# Altium PCB HumFlex1.PcbDoc
Units mm, origin at the board's own origin, x right, y up, seen from the top; angles counter-clockwise.
Board outline 100 x 48 mm, 2 copper layers (Top Layer, Bottom Layer), stack 0.187 mm thick; 16 components, 9 nets, 76 pads, 903 vias.
Unrouted connection lines stored in the file: 38.
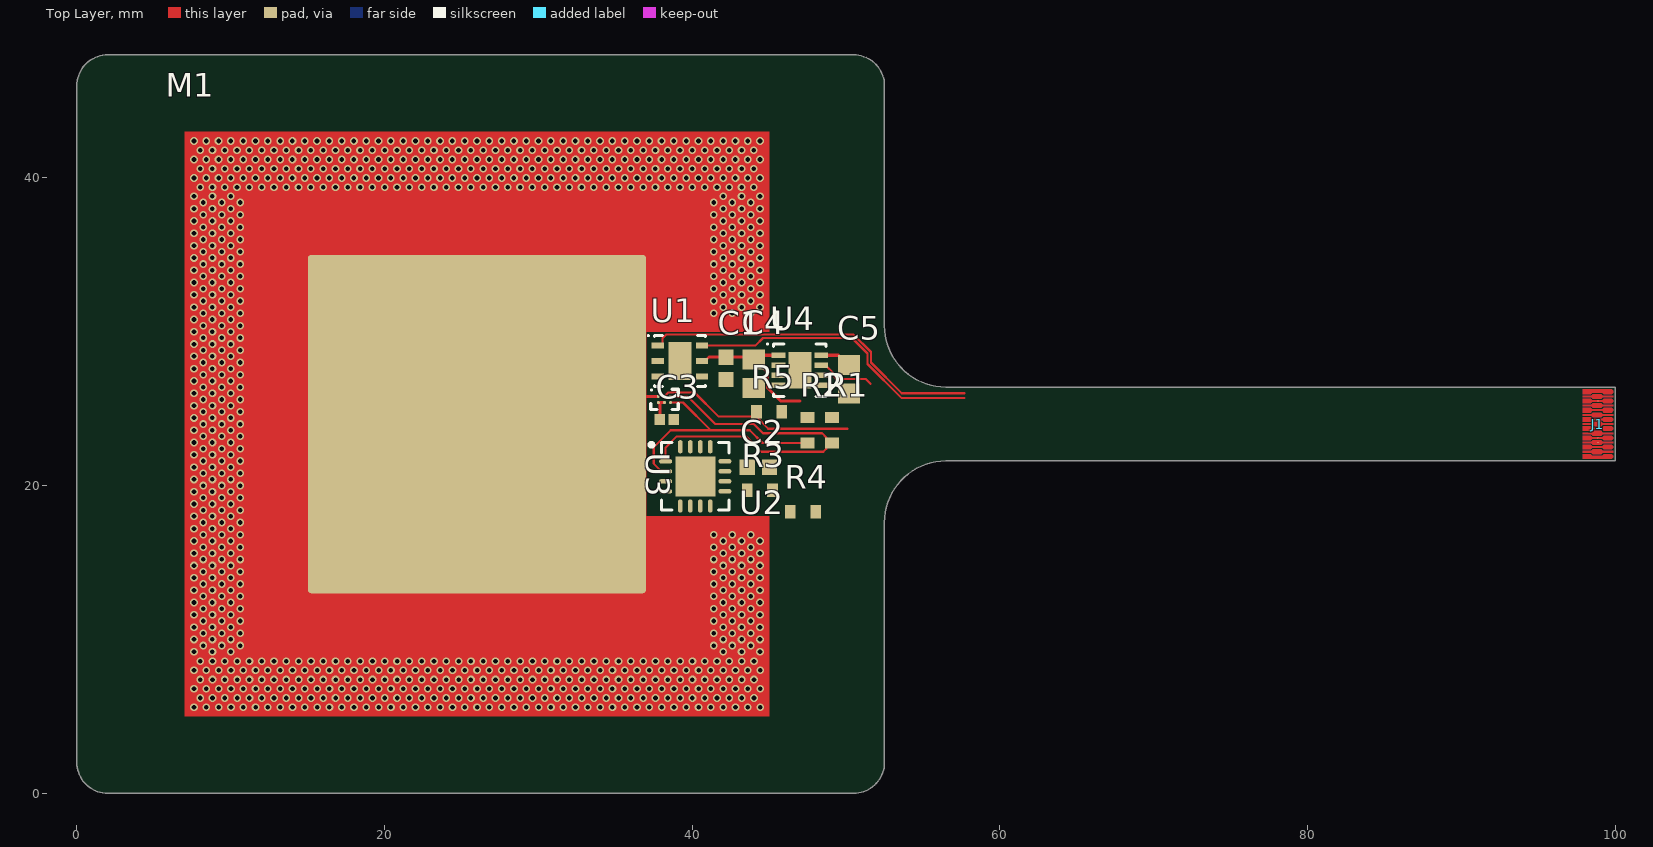
[diagram p0: Top Layer view]
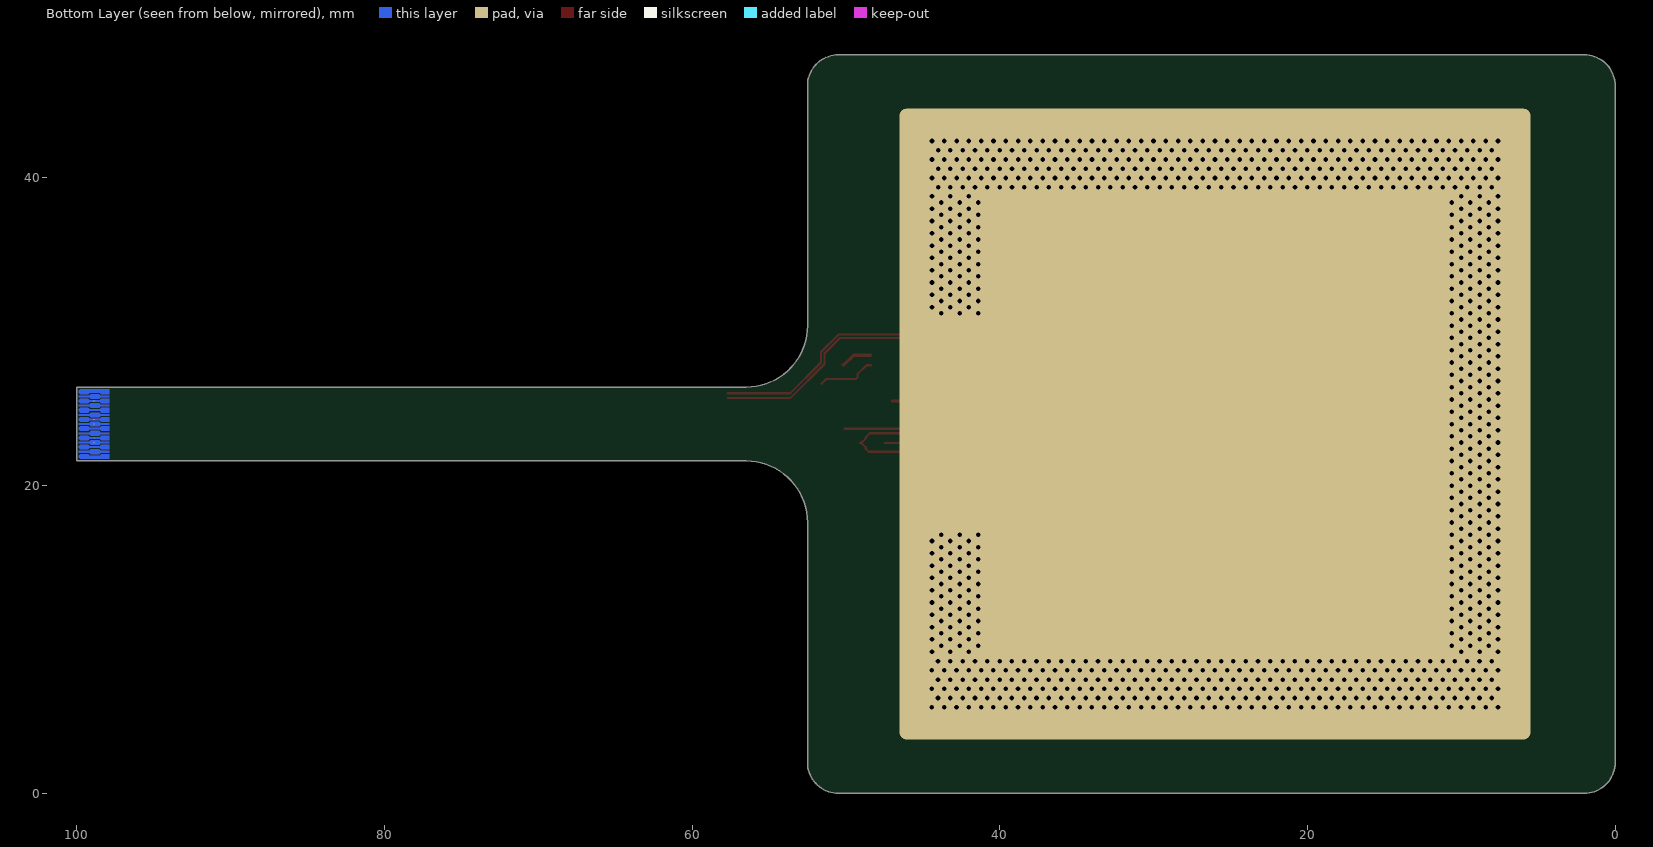
[diagram p1: Bottom Layer view, seen from below]

## Layer stack, top to bottom
Stiffener 1: core 0.1016, Core-009, Dk 4.5
Board Layer Stack Top Coverlay: solder mask 0.012, FC-001, Dk 4
Top Layer: signal copper 0.0175
Dielectric 1: core 0.0508, Core-001, Dk 4.1
Bottom Layer: signal copper 0.0175
Board Layer Stack Bottom Coverlay: solder mask 0.012, FC-001, Dk 4

## Board outline
2,0 cw(c2,2) 0,2 0,46 cw(c2,46) 2,48 50.5,48 cw(c50.5,46) 52.5,46 52.5,30.4 ccw(c56.5,30.4) 56.5,26.4 100,26.4 100,21.6 56.5,21.6 ccw(c56.5,17.6) 52.5,17.6 52.5,2 cw(c50.5,2) 50.5,0

## Design rules (kind name [scope] priority, off if disabled: settings)
Clearance [All] p1: gap=0.08 ignorepadtopadclearanceinfootprint=FALSE
HoleSize [All] p1: absolutevalues=TRUE maxlimit=2.54 minlimit=0.2 maxpercent=80.000 minpercent=20.000
HoleToHoleClearance [All] p1: gap=0.3 allowstackedmicrovias=TRUE
MinimumAnnularRing [All] p1: minimumring=0.1
MinimumSolderMaskSliver [HasFootprint('PeltierElement')] p1: minsoldermaskwidth=0
MinimumSolderMaskSliver MinimumSolderMaskSliver_1 [All] p2: minsoldermaskwidth=0
PolygonConnect [All] p1: connectstyle=Relief reliefconductorwidth=0.254 reliefentries=4 polygonreliefangle="90 Angle" airgapwidth=0.254
RoutingVias [All] p1: holewidth=0.711 width=1.27 viastyle="Through Hole" minholewidth=0.711 minwidth=1.27 maxholewidth=0.711 maxwidth=1.27
SilkToSilkClearance [All] p1: silktosilkclearance=0.15
SilkToSolderMaskClearance [IsPad] p1: minsilkscreentomaskgap=0.15 clearancetoexposedcopper=TRUE
SolderMaskExpansion [All] p1: expansion=0.1 istentingtop=FALSE
Width [All] p1: maxlimit=2 minlimit=0.08 preferedwidth=0.2
25 further rules are at their usual default settings.

## Components (designator, comment, footprint, x,y, rotation, side; value= is the part's Value field where it differs from the comment)
C1 "100nF" CAP_SM0603_YAGEOCC2_N 42.2,27.627 r90 top
C2 "100nF" CAP_SM0603_YAGEOCC2_N 44.3,21.2 r180 top
C3 "10nF" CAP_SM0402_YAGEOCC2_N 38.35,24.3 r0 top
C4 "1uF" CAP_SM0805_YAGEOCC2_N 44,27.273 r90 top
C5 "1uF" CAP_SM0805_YAGEOCC2_N 50.2,26.927 r90 top
J1 "Dual Row 15Pos Connector" AYF331535_FPC 99.886,26.1 r270 top
M1 "Peltier Element" PeltierElement 26.011,24 r0 top locked
R1 "10K" RES_SM0603_YAGEORC_N 49.1,23.6 r90 top
R2 "10K" RES_SM0603_YAGEORC_N 47.5,23.6 r90 top
R3 "10K" RES_SM0603_YAGEORC_N 44.4,19.7 r0 top
R4 "10K" RES_SM0603_YAGEORC_N 47.2,18.3 r0 top
R5 "10K" RES_SM0603_YAGEORC_N 45,24.8 r0 top
U1 "SI7051-A20-IMR" SI7050/1/2/3/4/5 39.2,28.1 r0 top
U2 "ADT7422CCPZ-RL7" ADT7422_QFN 40.2,20.6 r0 top
U3 "AS6221" AS6221_BGA 38.2,25.6 r0 top
U4 "TPS78433" TPS784xxxQDRBRQ1_SON 47,27.5 r0 top

## Footprints (in the part's own frame and the unit in brackets; to place one, negate y for a bottom-side part, rotate by r counter-clockwise, add the part's x,y. Pads: shape width x height; smd on the part's side, far side on the other; paste and mask are expansions set on the pad)
ADT7422_QFN [mm] "QFN, 16-Leads, Body 4,00x4,00mm, Pitch 0,65mm, Thermal Pad 2,60x2,60mm, IPC Medium Density"
  oval 0.85x0.3 smd: 1(-1.925,0.975) 2(-1.925,0.325) 3(-1.925,-0.325) 4(-1.925,-0.975) 9(1.925,-0.975) 10(1.925,-0.325) 11(1.925,0.325) 12(1.925,0.975)
  oval 0.3x0.85 smd: 5(-0.975,-1.925) 6(-0.325,-1.925) 7(0.325,-1.925) 8(0.975,-1.925) 13(0.975,1.925) 14(0.325,1.925) 15(-0.325,1.925) 16(-0.975,1.925)
  rect 2.6x2.6 smd: 17(0,0)
  silkscreen extent -2.97,-2.2 2.2,2.2, body extent -2.05,-2.05 2.05,2.05, height 0.8
AS6221_BGA [mm] "BGA, 6-Leads, Body 1,02x1,50mmx0,53mm, Pitch 0,40mm"
  round 0.2 smd: A1(-0.4,0.2) A2(0,0.2) A3(0.4,0.2) B1(-0.4,-0.2) B2(0,-0.2) B3(0.4,-0.2)
  silkscreen extent -0.9,-0.66 0.89,0.66, body extent -0.74,-0.51 0.74,0.51, height 0.55
AYF331535_FPC [mil]
  round 1 all layers, no hole paste-99999 mask+3.94: 1(0,-39.37) 2(11.81,-39.37)
  round 1 all layers, no hole paste-99999: 3(23.62,-39.37) 4(35.43,-39.37) 5(47.24,-39.37) 6(59.06,-39.37) 7(70.87,-39.37) 8(82.68,-39.37) 9(94.49,-39.37) 10(106.3,-39.37) 11(118.11,-39.37) 12(129.92,-39.37) 13(141.73,-39.37) 14(153.54,-39.37) 15(165.35,-39.37)
  Top Layer region: 159.45,-78.74 159.45,-58.07 163.39,-54.13 163.39,-54.13 163.39,-28.54 159.45,-24.61 159.45,-24.61 159.45,-3.94 163.39,0 167.32,0 171.26,-3.94 171.26,-78.74
  Top Layer region: 147.64,-52.17 147.64,-30.51 151.57,-26.57 151.57,0 155.51,0 155.51,-26.57 159.45,-30.51 159.45,-52.17 155.51,-56.1 155.51,-78.74 151.57,-78.74 151.57,-56.1
  Top Layer region: 135.83,-78.74 135.83,-58.07 139.76,-54.13 139.76,-28.54 135.83,-24.61 135.83,-3.94 139.76,0 143.7,0 147.64,-3.94 147.64,-24.61 143.7,-28.54 143.7,-54.13 147.64,-58.07 147.64,-78.74
  Top Layer region: 124.02,-52.17 124.02,-30.51 127.95,-26.57 127.95,0 131.89,0 131.89,-26.57 135.83,-30.51 135.83,-52.17 131.89,-56.1 131.89,-78.74 127.95,-78.74 127.95,-56.1
  Top Layer region: 112.2,-78.74 112.2,-58.07 116.14,-54.13 116.14,-28.54 112.2,-24.61 112.2,-3.94 116.14,0 120.08,0 124.02,-3.94 124.02,-24.61 120.08,-28.54 120.08,-54.13 124.02,-58.07 124.02,-78.74
  Top Layer region: 100.39,-52.17 100.39,-30.51 104.33,-26.57 104.33,0 108.27,0 108.27,-26.57 112.2,-30.51 112.2,-52.17 108.27,-56.1 108.27,-78.74 104.33,-78.74 104.33,-56.1
  Top Layer region: 88.58,-78.74 88.58,-58.07 92.52,-54.13 92.52,-28.54 88.58,-24.61 88.58,-3.94 92.52,0 96.46,0 100.39,-3.94 100.39,-24.61 96.46,-28.54 96.46,-54.13 100.39,-58.07 100.39,-78.74
  Top Layer region: 76.77,-52.17 76.77,-30.51 80.71,-26.57 80.71,0 84.65,0 84.65,-26.57 88.58,-30.51 88.58,-52.17 84.65,-56.1 84.65,-78.74 80.71,-78.74 80.71,-56.1
  Top Layer region: 53.15,-52.17 53.15,-30.51 57.09,-26.57 57.09,0 61.02,0 61.02,-26.57 64.96,-30.51 64.96,-52.17 61.02,-56.1 61.02,-78.74 57.09,-78.74 57.09,-56.1
  Top Layer region: 64.96,-78.74 64.96,-58.07 68.9,-54.13 68.9,-28.54 64.96,-24.61 64.96,-3.94 68.9,0 72.83,0 76.77,-3.94 76.77,-24.61 72.83,-28.54 72.83,-54.13 76.77,-58.07 76.77,-78.74
  Top Layer region: 41.34,-78.74 41.34,-58.07 45.28,-54.13 45.28,-28.54 41.34,-24.61 41.34,-3.94 45.28,0 49.21,0 53.15,-3.94 53.15,-24.61 49.21,-28.54 49.21,-54.13 53.15,-58.07 53.15,-78.74
  Top Layer region: 29.53,-52.17 29.53,-30.51 33.46,-26.57 33.46,0 37.4,0 37.4,-26.57 41.34,-30.51 41.34,-52.17 37.4,-56.1 37.4,-78.74 33.46,-78.74 33.46,-56.1
  Top Layer region: 17.72,-78.74 17.72,-58.07 21.65,-54.13 21.65,-28.54 17.72,-24.61 17.72,-3.94 21.65,0 25.59,0 29.53,-3.94 29.53,-24.61 25.59,-28.54 25.59,-54.13 29.53,-58.07 29.53,-78.74
  Top Layer region: 5.91,-52.17 5.91,-30.51 9.84,-26.57 9.84,0 13.78,0 13.78,-26.57 17.72,-30.51 17.72,-52.17 13.78,-56.1 13.78,-78.74 9.84,-78.74 9.84,-56.1
  Top Layer region: -5.91,-78.74 -5.91,-3.94 -1.97,0 -1.97,0 1.97,0 5.91,-3.94 5.91,-24.61 1.97,-28.54 1.97,-54.13 5.91,-58.07 5.91,-78.74
  Bottom Layer region: 159.45,-78.74 159.45,-58.07 163.39,-54.13 163.39,-54.13 163.39,-28.54 159.45,-24.61 159.45,-24.61 159.45,-3.94 163.39,0 167.32,0 171.26,-3.94 171.26,-78.74
  Bottom Layer region: 147.64,-52.17 147.64,-30.51 151.57,-26.57 151.57,0 155.51,0 155.51,-26.57 159.45,-30.51 159.45,-52.17 155.51,-56.1 155.51,-78.74 151.57,-78.74 151.57,-56.1
  Bottom Layer region: 135.83,-78.74 135.83,-58.07 139.76,-54.13 139.76,-28.54 135.83,-24.61 135.83,-3.94 139.76,0 143.7,0 147.64,-3.94 147.64,-24.61 143.7,-28.54 143.7,-54.13 147.64,-58.07 147.64,-78.74
  Bottom Layer region: 124.02,-52.17 124.02,-30.51 127.95,-26.57 127.95,0 131.89,0 131.89,-26.57 135.83,-30.51 135.83,-52.17 131.89,-56.1 131.89,-78.74 127.95,-78.74 127.95,-56.1
  Bottom Layer region: 112.2,-78.74 112.2,-58.07 116.14,-54.13 116.14,-28.54 112.2,-24.61 112.2,-3.94 116.14,0 120.08,0 124.02,-3.94 124.02,-24.61 120.08,-28.54 120.08,-54.13 124.02,-58.07 124.02,-78.74
  Bottom Layer region: 100.39,-52.17 100.39,-30.51 104.33,-26.57 104.33,0 108.27,0 108.27,-26.57 112.2,-30.51 112.2,-52.17 108.27,-56.1 108.27,-78.74 104.33,-78.74 104.33,-56.1
  Bottom Layer region: 88.58,-78.74 88.58,-58.07 92.52,-54.13 92.52,-28.54 88.58,-24.61 88.58,-3.94 92.52,0 96.46,0 100.39,-3.94 100.39,-24.61 96.46,-28.54 96.46,-54.13 100.39,-58.07 100.39,-78.74
  Bottom Layer region: 76.77,-52.17 76.77,-30.51 80.71,-26.57 80.71,0 84.65,0 84.65,-26.57 88.58,-30.51 88.58,-52.17 84.65,-56.1 84.65,-78.74 80.71,-78.74 80.71,-56.1
  Bottom Layer region: 53.15,-52.17 53.15,-30.51 57.09,-26.57 57.09,0 61.02,0 61.02,-26.57 64.96,-30.51 64.96,-52.17 61.02,-56.1 61.02,-78.74 57.09,-78.74 57.09,-56.1
  Bottom Layer region: 64.96,-78.74 64.96,-58.07 68.9,-54.13 68.9,-28.54 64.96,-24.61 64.96,-3.94 68.9,0 72.83,0 76.77,-3.94 76.77,-24.61 72.83,-28.54 72.83,-54.13 76.77,-58.07 76.77,-78.74
  Bottom Layer region: 41.34,-78.74 41.34,-58.07 45.28,-54.13 45.28,-28.54 41.34,-24.61 41.34,-3.94 45.28,0 49.21,0 53.15,-3.94 53.15,-24.61 49.21,-28.54 49.21,-54.13 53.15,-58.07 53.15,-78.74
  Bottom Layer region: 29.53,-52.17 29.53,-30.51 33.46,-26.57 33.46,0 37.4,0 37.4,-26.57 41.34,-30.51 41.34,-52.17 37.4,-56.1 37.4,-78.74 33.46,-78.74 33.46,-56.1
  Bottom Layer region: 17.72,-78.74 17.72,-58.07 21.65,-54.13 21.65,-28.54 17.72,-24.61 17.72,-3.94 21.65,0 25.59,0 29.53,-3.94 29.53,-24.61 25.59,-28.54 25.59,-54.13 29.53,-58.07 29.53,-78.74
  Bottom Layer region: 5.91,-52.17 5.91,-30.51 9.84,-26.57 9.84,0 13.78,0 13.78,-26.57 17.72,-30.51 17.72,-52.17 13.78,-56.1 13.78,-78.74 9.84,-78.74 9.84,-56.1
  Bottom Layer region: -5.91,-78.74 -5.91,-3.94 -1.97,0 -1.97,0 1.97,0 5.91,-3.94 5.91,-24.61 1.97,-28.54 1.97,-54.13 5.91,-58.07 5.91,-78.74
CAP_SM0402_YAGEOCC2_N [mm] "Capacitor, Yageo CC Class2, SM0402, IPC Medium Density"
  rect 0.68x0.72 smd: 1(-0.45,0) 2(0.45,0)
  body extent -0.55,-0.35 0.55,0.35, height 0.6
CAP_SM0603_YAGEOCC2_N [mm] "Capacitor, Yageo CC Class2, SM0603, IPC Medium Density"
  rect 1x1 smd: 1(-0.727,0) 2(0.727,0)
  body extent -0.9,-0.5 0.9,0.5, height 0.9
CAP_SM0805_YAGEOCC2_N [mm] "Capacitor, Yageo CC Class2, SM0805, IPC Medium Density"
  rect 1.3x1.45 smd: 1(-0.927,0) 2(0.927,0)
  body extent -1.1,-0.72 1.1,0.72, height 1.45
PeltierElement [mm]
  rrect2% 22x22 smd paste-2539.97: 1(0,0)
  rrect2% 41x41 smd far side paste-2539.97: 1(0,0)
  Top Layer region: -19,19 -19,-19 19,-19 19,-6 11,-6 11,6 19,6 19,19 -18.4,19 -18.8,19
  body extent -20,-20 20,20, height 4
RES_SM0603_YAGEORC_N [mm] "Resistor, Yageo RC_L, SM0603, IPC Medium Density"
  rect 0.7x0.9 smd: 1(-0.827,0) 2(0.827,0)
  body extent -0.85,-0.45 0.85,0.45, height 0.55
SI7050/1/2/3/4/5 [mm] "SON, 6-Leads, Body 3,00x3,00mm, Pitch 1,00mm, Thermal Pad 2,50x1,50mm, IPC Medium Density"
  rect 0.8x0.4 smd: 1(-1.44,1) 2(-1.44,0) 3(-1.44,-1) 4(1.44,-1) 5(1.44,0) 6(1.44,1)
  rect 1.5x2.5 smd: 7(0,0)
  silkscreen extent -2.1,-1.65 1.65,1.7, body extent -1.5,-1.5 1.5,1.5, height 0.8
TPS784xxxQDRBRQ1_SON [mm] "SON127P600-8N"
  rect 0.9x0.35 smd: 1(-1.395,0.975) 2(-1.395,0.325) 3(-1.395,-0.325) 4(-1.395,-0.975) 5(1.395,-0.975) 6(1.395,-0.325) 7(1.395,0.325) 8(1.395,0.975)
  rect 1.49x2.4 smd: 9(0,0)
  silkscreen extent -2.15,-1.7 1.7,1.75, body extent -1.55,-1.55 1.55,1.55, height 1

## Part data
C1 C2: library part CC0603KRX7R9BB104, "CAP 100nF SM0603 X7R 50V YAGEO CC2", Manufacturer=Yageo, Package=0603, Supplier Part Number 1=1362556, Tolerance (%)=10, Voltage Rating (Volts)=50, Category=Capacitor, ComponentLink1Description="Manufacturer Website", ComponentLink1URL=http://www.yageo.com, Manufacturer Part Number=CC0603KRX7R9BB104, Supplier 1=Farnell, Supplier 2=Digi-Key, Supplier Part Number 2=311-1344-1-ND
C3: library part CC0402KRX7R9BB103, "CAP 10nF SM0402 X7R 50V YAGEO CC2", Manufacturer=Yageo, Manufacturer Part Number=CC0603KRX7R9BB103, Package=0603, Supplier Part Number 1=3369167, Tolerance (%)=10, Voltage Rating (Volts)=50, Category=Capacitor, ComponentLink1Description="Manufacturer Website", ComponentLink1URL=http://www.yageo.com, Supplier 1=Farnell, Supplier 2=Mouser, Supplier 3=Digi-Key, Supplier Part Number 2=603-CC402KRX7R9BB103, Supplier Part Number 3=311-1349-1-ND
C4 C5: library part CC0805KKX7R8BB105, "CAP 1uF SM0805 X7R 25V YAGEO CC2", Manufacturer=Yageo, Package=0805, Supplier Part Number 1=1458903, Tolerance (%)=10, Voltage Rating (Volts)=25, Category=Capacitor, ComponentLink1Description="Manufacturer Website", ComponentLink1URL=http://www.yageo.com, Manufacturer Part Number=CC0805KKX7R8BB105, Supplier 1=Farnell, Supplier 2=Digi-Key, Supplier Part Number 2=311-1456-1-ND
J1: library part Connector_15_DualRow
M1: library part PeltierElement, "Peltier element 40mm x 40mm"
R1 R2 R3 R4 R5: library part RC0603FR-0710KL, "RES 10K SM0603 YAGEO RC_L", Manufacturer=Yageo, Package=0603, Power (Watts)=0.1, Resistance (Ohms)=10000, Supplier Part Number 1=9238603, Tolerance (%)=1, Category=Resistor, ComponentLink1Description="Manufacturer Website", ComponentLink1URL=http://www.yageo.com, Manufacturer Part Number=RC0603FR-0710KL, Supplier 1=Farnell, Supplier 2=Digi-Key, Supplier Part Number 2=311-10.0KHRCT-ND
U1: "Si7051-A20 Temperature Sensor ±0.1°C maximum accuracy, Digital I2C, -40°C ~ 125°C 14b 6-DFN (3x3)", Supplier Part Number 1=3265013RL, Supplier 1=Farnell, Supplier 2=Mouser, Supplier 3=Digi-Key, Supplier Part Number 2=634-SI7051-A20-IMR, Supplier Part Number 3=336-4764-1-ND
U2: "ADT7422 Temperature Sensor, ±0.1°C Accuracy, 16b, Digital I2C /  -40°C bis 125°C 16-LFCSP-WQ (4x4)", Supplier Part Number 1=584-ADT7422CCPZ-RL7, Supplier 1=Mouser, Supplier 2=Digi-Key, Supplier Part Number 2=505-ADT7422CCPZ-RL7CT-ND
U3: library part AS6221-AWLT-S, "AS6221 Temperature Sensor Digital -40°C ~ 125°C 16b 6-WLCSP (1.5x1.03)", Supplier Part Number 1=985-AS6221-AWLT-S, Supplier 1=Mouser, Supplier 2=Digi-Key, Supplier Part Number 2=4991-AS6221-AWLT-SCT-ND
U4: library part TPS78433QWDRBRQ1, "TPS78433-Q1 3.3V, 300-mA, High-PSRR Low-Dropout Voltage Regulator With High Accuracy and Enable,  8-SON (3x3)", Supplier Part Number 1=595-TPS78433QWDRBRQ1, Supplier 1=Mouser, Supplier 2=Digi-Key, Supplier Part Number 2=296-TPS78433QWDRBRQ1CT-ND

## Via types
v1: diameter 0.5, hole 0.3, Top Layer to Bottom Layer, tented top, 903 vias

## Nets (pads, with @x,y where several pads share a name; then routed paths per layer and width w, separated by ;. In a path a pad name is that pad's centre, name@x,y a point inside that pad or via, vN(x,y) a via of type N, cw(c..) or ccw(c..) an arc to the next point about the centre after c; other vN are vias at no path point)
3V: C1.2 C2.2 C3.1 C4.2 R1.2 R2.2 R3.2 R4.2 R5.2 U1.5 U2.12 U3.B1 U3.B2 U4.1 | length 11.5
  Top Layer w0.2: C3.1 37.9,25.3 U3.B1 37.9,25.4 U3.B2 ; U1.5 40.84,28.1 41.094,28.354 C1.2 43.846,28.354 C4.2 ; U4.1 44.275,28.475 C4.2 ; 47,25.5 45.75,25.5 44.908,26.343 44.908,27.367 44.075,28.2 C4.2
GND: C1.1 C2.1 C3.2 C4.1 C5.1 M1.1 U1.2 U2.3 U2.4 U2.5 U2.6 U2.7 U2.8 U2.11 U2.13 U2.14 U2.15 U2.16 U2.17 U3.A1 U4.5 | length 11.9
  Top Layer w0.2: M1.1@26.011,24 36.791,25.781 U3.A1
  other v1: 7.616,5.588 8.416,5.588 9.216,5.588 10.016,5.588 10.816,5.588 11.616,5.588 12.416,5.588 13.216,5.588 14.016,5.588 14.816,5.588 15.616,5.588 16.416,5.588 17.216,5.588 18.016,5.588 18.816,5.588 19.616,5.588 20.416,5.588 21.216,5.588 22.016,5.588 22.816,5.588 23.616,5.588 24.416,5.588 25.216,5.588 26.016,5.588 26.816,5.588 27.616,5.588 28.416,5.588 29.216,5.588 30.016,5.588 30.816,5.588 31.616,5.588 32.416,5.588 33.216,5.588 34.016,5.588 34.816,5.588 35.616,5.588 36.416,5.588 37.216,5.588 38.016,5.588 38.816,5.588 39.616,5.588 40.416,5.588 41.216,5.588 42.016,5.588 42.816,5.588 43.616,5.588 44.416,5.588 8.016,6.188 8.816,6.188 9.616,6.188 10.416,6.188 11.216,6.188 12.016,6.188 12.816,6.188 13.616,6.188 14.416,6.188 15.216,6.188 16.016,6.188 16.816,6.188 17.616,6.188 18.416,6.188 19.216,6.188 20.016,6.188 20.816,6.188 21.616,6.188 22.416,6.188 23.216,6.188 24.016,6.188 24.816,6.188 25.616,6.188 26.416,6.188 27.216,6.188 28.016,6.188 28.816,6.188 29.616,6.188 30.416,6.188 31.216,6.188 32.016,6.188 32.816,6.188 33.616,6.188 34.416,6.188 35.216,6.188 36.016,6.188 36.816,6.188 37.616,6.188 38.416,6.188 39.216,6.188 40.016,6.188 40.816,6.188 41.616,6.188 42.416,6.188 43.216,6.188 44.016,6.188 7.616,6.788 8.416,6.788 9.216,6.788 10.016,6.788 10.816,6.788 11.616,6.788 12.416,6.788 13.216,6.788 14.016,6.788 14.816,6.788 15.616,6.788 16.416,6.788 17.216,6.788 18.016,6.788 18.816,6.788 19.616,6.788 20.416,6.788 21.216,6.788 22.016,6.788 22.816,6.788 23.616,6.788 24.416,6.788 25.216,6.788 26.016,6.788 26.816,6.788 27.616,6.788 28.416,6.788 29.216,6.788 30.016,6.788 30.816,6.788 31.616,6.788 32.416,6.788 33.216,6.788 34.016,6.788 34.816,6.788 35.616,6.788 36.416,6.788 37.216,6.788 38.016,6.788 38.816,6.788 39.616,6.788 40.416,6.788 41.216,6.788 42.016,6.788 42.816,6.788 43.616,6.788 44.416,6.788 8.016,7.388 8.816,7.388 9.616,7.388 10.416,7.388 11.216,7.388 12.016,7.388 12.816,7.388 13.616,7.388 14.416,7.388 15.216,7.388 16.016,7.388 16.816,7.388 17.616,7.388 18.416,7.388 19.216,7.388 20.016,7.388 20.816,7.388 21.616,7.388 22.416,7.388 23.216,7.388 24.016,7.388 24.816,7.388 25.616,7.388 26.416,7.388 27.216,7.388 28.016,7.388 28.816,7.388 29.616,7.388 30.416,7.388 31.216,7.388 32.016,7.388 32.816,7.388 33.616,7.388 34.416,7.388 35.216,7.388 36.016,7.388 36.816,7.388 37.616,7.388 38.416,7.388 39.216,7.388 40.016,7.388 40.816,7.388 41.616,7.388 42.416,7.388 43.216,7.388 44.016,7.388 7.616,7.988 8.416,7.988 9.216,7.988 10.016,7.988 10.816,7.988 11.616,7.988 12.416,7.988 13.216,7.988 14.016,7.988 14.816,7.988 15.616,7.988 16.416,7.988 17.216,7.988 18.016,7.988 18.816,7.988 19.616,7.988 20.416,7.988 21.216,7.988 22.016,7.988 22.816,7.988 23.616,7.988 24.416,7.988 25.216,7.988 26.016,7.988 26.816,7.988 27.616,7.988 28.416,7.988 29.216,7.988 30.016,7.988 30.816,7.988 31.616,7.988 32.416,7.988 33.216,7.988 34.016,7.988 34.816,7.988 35.616,7.988 36.416,7.988 37.216,7.988 38.016,7.988 38.816,7.988 39.616,7.988 40.416,7.988 41.216,7.988 42.016,7.988 42.816,7.988 43.616,7.988 44.416,7.988 8.016,8.588 8.816,8.588 9.616,8.588 10.416,8.588 11.216,8.588 12.016,8.588 12.816,8.588 13.616,8.588 14.416,8.588 15.216,8.588 16.016,8.588 16.816,8.588 17.616,8.588 18.416,8.588 19.216,8.588 20.016,8.588 20.816,8.588 21.616,8.588 22.416,8.588 23.216,8.588 24.016,8.588 24.816,8.588 25.616,8.588 26.416,8.588 27.216,8.588 28.016,8.588 28.816,8.588 29.616,8.588 30.416,8.588 31.216,8.588 32.016,8.588 32.816,8.588 33.616,8.588 34.416,8.588 35.216,8.588 36.016,8.588 36.816,8.588 37.616,8.588 38.416,8.588 39.216,8.588 40.016,8.588 40.816,8.588 41.616,8.588 42.416,8.588 43.216,8.588 44.016,8.588 7.611,9.2 8.811,9.2 10.011,9.2 42.011,9.2 43.211,9.2 44.411,9.2 8.211,9.6 9.411,9.6 10.611,9.6 41.411,9.6 42.611,9.6 43.811,9.6 7.611,10 8.811,10 10.011,10 42.011,10 43.211,10 44.411,10 8.211,10.4 9.411,10.4 10.611,10.4 41.411,10.4 42.611,10.4 43.811,10.4 7.611,10.8 8.811,10.8 10.011,10.8 42.011,10.8 43.211,10.8 44.411,10.8 8.211,11.2 9.411,11.2 10.611,11.2 41.411,11.2 42.611,11.2 43.811,11.2 7.611,11.6 8.811,11.6 10.011,11.6 42.011,11.6 43.211,11.6 44.411,11.6 8.211,12 9.411,12 10.611,12 41.411,12 42.611,12 43.811,12 7.611,12.4 8.811,12.4 10.011,12.4 42.011,12.4 43.211,12.4 44.411,12.4 8.211,12.8 9.411,12.8 10.611,12.8 41.411,12.8 42.611,12.8 43.811,12.8 7.611,13.2 8.811,13.2 10.011,13.2 42.011,13.2 43.211,13.2 44.411,13.2 8.211,13.6 9.411,13.6 10.611,13.6 41.411,13.6 42.611,13.6 43.811,13.6 7.611,14 8.811,14 10.011,14 42.011,14 43.211,14 44.411,14 8.211,14.4 9.411,14.4 10.611,14.4 41.411,14.4 42.611,14.4 43.811,14.4 7.611,14.8 8.811,14.8 10.011,14.8 42.011,14.8 43.211,14.8 44.411,14.8 8.211,15.2 9.411,15.2 10.611,15.2 41.411,15.2 42.611,15.2 43.811,15.2 7.611,15.6 8.811,15.6 10.011,15.6 42.011,15.6 43.211,15.6 44.411,15.6 8.211,16 9.411,16 10.611,16 41.411,16 42.611,16 43.811,16 7.611,16.4 8.811,16.4 10.011,16.4 42.011,16.4 43.211,16.4 44.411,16.4 8.211,16.8 9.411,16.8 10.611,16.8 41.411,16.8 42.611,16.8 43.811,16.8 7.611,17.2 8.811,17.2 10.011,17.2 8.211,17.6 9.411,17.6 10.611,17.6 7.611,18 8.811,18 10.011,18 8.211,18.4 9.411,18.4 10.611,18.4 7.611,18.8 8.811,18.8 10.011,18.8 8.211,19.2 9.411,19.2 10.611,19.2 7.611,19.6 8.811,19.6 10.011,19.6 8.211,20 9.411,20 10.611,20 7.611,20.4 8.811,20.4 10.011,20.4 8.211,20.8 9.411,20.8 10.611,20.8 7.611,21.2 8.811,21.2 10.011,21.2 8.211,21.6 9.411,21.6 10.611,21.6 7.611,22 8.811,22 10.011,22 8.211,22.4 9.411,22.4 10.611,22.4 7.611,22.8 8.811,22.8 10.011,22.8 8.211,23.2 9.411,23.2 10.611,23.2 7.611,23.6 8.811,23.6 10.011,23.6 8.211,24 9.411,24 10.611,24 7.611,24.4 8.811,24.4 10.011,24.4 8.211,24.8 9.411,24.8 10.611,24.8 7.611,25.2 8.811,25.2 10.011,25.2 8.211,25.6 9.411,25.6 10.611,25.6 7.611,26 8.811,26 10.011,26 8.211,26.4 9.411,26.4 10.611,26.4 7.611,26.8 8.811,26.8 10.011,26.8 8.211,27.2 9.411,27.2 10.611,27.2 7.611,27.6 8.811,27.6 10.011,27.6 8.211,28 9.411,28 10.611,28 7.611,28.4 8.811,28.4 10.011,28.4 8.211,28.8 9.411,28.8 10.611,28.8 7.611,29.2 8.811,29.2 10.011,29.2 8.211,29.6 9.411,29.6 10.611,29.6 7.611,30 8.811,30 10.011,30 8.211,30.4 9.411,30.4 10.611,30.4 7.611,30.8 8.811,30.8 10.011,30.8 8.211,31.2 9.411,31.2 10.611,31.2 41.411,31.2 42.611,31.2 43.811,31.2 7.611,31.6 8.811,31.6 10.011,31.6 42.011,31.6 43.211,31.6 44.411,31.6 8.211,32 9.411,32 10.611,32 41.411,32 42.611,32 43.811,32 7.611,32.4 8.811,32.4 10.011,32.4 42.011,32.4 43.211,32.4 44.411,32.4 8.211,32.8 9.411,32.8 10.611,32.8 41.411,32.8 42.611,32.8 43.811,32.8 7.611,33.2 8.811,33.2 10.011,33.2 42.011,33.2 43.211,33.2 44.411,33.2 8.211,33.6 9.411,33.6 10.611,33.6 41.411,33.6 42.611,33.6 43.811,33.6 7.611,34 8.811,34 10.011,34 42.011,34 43.211,34 44.411,34 8.211,34.4 9.411,34.4 10.611,34.4 41.411,34.4 42.611,34.4 43.811,34.4 7.611,34.8 8.811,34.8 10.011,34.8 42.011,34.8 43.211,34.8 44.411,34.8 8.211,35.2 9.411,35.2 10.611,35.2 41.411,35.2 42.611,35.2 43.811,35.2 7.611,35.6 8.811,35.6 10.011,35.6 42.011,35.6 43.211,35.6 44.411,35.6 8.211,36 9.411,36 10.611,36 41.411,36 42.611,36 43.811,36 7.611,36.4 8.811,36.4 10.011,36.4 42.011,36.4 43.211,36.4 44.411,36.4 8.211,36.8 9.411,36.8 10.611,36.8 41.411,36.8 42.611,36.8 43.811,36.8 7.611,37.2 8.811,37.2 10.011,37.2 42.011,37.2 43.211,37.2 44.411,37.2 8.211,37.6 9.411,37.6 10.611,37.6 41.411,37.6 42.611,37.6 43.811,37.6 7.611,38 8.811,38 10.011,38 42.011,38 43.211,38 44.411,38 8.211,38.4 9.411,38.4 10.611,38.4 41.411,38.4 42.611,38.4 43.811,38.4 7.611,38.8 8.811,38.8 10.011,38.8 42.011,38.8 43.211,38.8 44.411,38.8 8.011,39.4 8.811,39.4 9.611,39.4 10.411,39.4 11.211,39.4 12.011,39.4 12.811,39.4 13.611,39.4 14.411,39.4 15.211,39.4 16.011,39.4 16.811,39.4 17.611,39.4 18.411,39.4 19.211,39.4 20.011,39.4 20.811,39.4 21.611,39.4 22.411,39.4 23.211,39.4 24.011,39.4 24.811,39.4 25.611,39.4 26.411,39.4 27.211,39.4 28.011,39.4 28.811,39.4 29.611,39.4 30.411,39.4 31.211,39.4 32.011,39.4 32.811,39.4 33.611,39.4 34.411,39.4 35.211,39.4 36.011,39.4 36.811,39.4 37.611,39.4 38.411,39.4 39.211,39.4 40.011,39.4 40.811,39.4 41.611,39.4 42.411,39.4 43.211,39.4 44.011,39.4 7.611,40 8.411,40 9.211,40 10.011,40 10.811,40 11.611,40 12.411,40 13.211,40 14.011,40 14.811,40 15.611,40 16.411,40 17.211,40 18.011,40 18.811,40 19.611,40 20.411,40 21.211,40 22.011,40 22.811,40 23.611,40 24.411,40 25.211,40 26.011,40 26.811,40 27.611,40 28.411,40 29.211,40 30.011,40 30.811,40 31.611,40 32.411,40 33.211,40 34.011,40 34.811,40 35.611,40 36.411,40 37.211,40 38.011,40 38.811,40 39.611,40 40.411,40 41.211,40 42.011,40 42.811,40 43.611,40 44.411,40 8.011,40.6 8.811,40.6 9.611,40.6 10.411,40.6 11.211,40.6 12.011,40.6 12.811,40.6 13.611,40.6 14.411,40.6 15.211,40.6 16.011,40.6 16.811,40.6 17.611,40.6 18.411,40.6 19.211,40.6 20.011,40.6 20.811,40.6 21.611,40.6 22.411,40.6 23.211,40.6 24.011,40.6 24.811,40.6 25.611,40.6 26.411,40.6 27.211,40.6 28.011,40.6 28.811,40.6 29.611,40.6 30.411,40.6 31.211,40.6 32.011,40.6 32.811,40.6 33.611,40.6 34.411,40.6 35.211,40.6 36.011,40.6 36.811,40.6 37.611,40.6 38.411,40.6 39.211,40.6 40.011,40.6 40.811,40.6 41.611,40.6 42.411,40.6 43.211,40.6 44.011,40.6 7.611,41.2 8.411,41.2 9.211,41.2 10.011,41.2 10.811,41.2 11.611,41.2 12.411,41.2 13.211,41.2 14.011,41.2 14.811,41.2 15.611,41.2 16.411,41.2 17.211,41.2 18.011,41.2 18.811,41.2 19.611,41.2 20.411,41.2 21.211,41.2 22.011,41.2 22.811,41.2 23.611,41.2 24.411,41.2 25.211,41.2 26.011,41.2 26.811,41.2 27.611,41.2 28.411,41.2 29.211,41.2 30.011,41.2 30.811,41.2 31.611,41.2 32.411,41.2 33.211,41.2 34.011,41.2 34.811,41.2 35.611,41.2 36.411,41.2 37.211,41.2 38.011,41.2 38.811,41.2 39.611,41.2 40.411,41.2 41.211,41.2 42.011,41.2 42.811,41.2 43.611,41.2 44.411,41.2 8.011,41.8 8.811,41.8 9.611,41.8 10.411,41.8 11.211,41.8 12.011,41.8 12.811,41.8 13.611,41.8 14.411,41.8 15.211,41.8 16.011,41.8 16.811,41.8 17.611,41.8 18.411,41.8 19.211,41.8 20.011,41.8 20.811,41.8 21.611,41.8 22.411,41.8 23.211,41.8 24.011,41.8 24.811,41.8 25.611,41.8 26.411,41.8 27.211,41.8 28.011,41.8 28.811,41.8 29.611,41.8 30.411,41.8 31.211,41.8 32.011,41.8 32.811,41.8 33.611,41.8 34.411,41.8 35.211,41.8 36.011,41.8 36.811,41.8 37.611,41.8 38.411,41.8 39.211,41.8 40.011,41.8 40.811,41.8 41.611,41.8 42.411,41.8 43.211,41.8 44.011,41.8 7.611,42.4 8.411,42.4 9.211,42.4 10.011,42.4 10.811,42.4 11.611,42.4 12.411,42.4 13.211,42.4 14.011,42.4 14.811,42.4 15.611,42.4 16.411,42.4 17.211,42.4 18.011,42.4 18.811,42.4 19.611,42.4 20.411,42.4 21.211,42.4 22.011,42.4 22.811,42.4 23.611,42.4 24.411,42.4 25.211,42.4 26.011,42.4 26.811,42.4 27.611,42.4 28.411,42.4 29.211,42.4 30.011,42.4 30.811,42.4 31.611,42.4 32.411,42.4 33.211,42.4 34.011,42.4 34.811,42.4 35.611,42.4 36.411,42.4 37.211,42.4 38.011,42.4 38.811,42.4 39.611,42.4 40.411,42.4 41.211,42.4 42.011,42.4 42.811,42.4 43.611,42.4 44.411,42.4
NetC5_2: C5.2 J1.15 U4.8 | length 2.1
  Top Layer w0.2: U4.8 49.504,28.475 50.125,27.854 C5.2
NetJ1_1: J1.1 R1.1 U1.6 U2.1 U3.A3 | length 43.7
  Top Layer w0.14: U2.1 38.275,22.475 39,23.2 43.5,23.2 44.5,22.2 48.527,22.2 48.72,22.393 48.72,22.493 R1.1@49,22.773 ; U3.A3 39.7,25.8 41.5,24 44,24 44.6,23.4 48.447,23.4 48.72,23.127 48.72,23.053 48.963,22.81 49.063,22.81 R1.1 ; U1.6 44.1,29.1 44.6,29.6 50.389,29.6 51.4,28.589 51.4,27.9 53.6,25.7 57.7,25.7
NetJ1_3: J1.3 R2.1 U1.1 U2.2 U3.B3 | length 38.6
  Top Layer w0.14: U1.1 37.96,29.1 38.06,29.2 38.06,29.56 38.32,29.82 50.48,29.82 51.62,28.68 51.62,28 53.62,26 57.7,26 ; U2.2 38,20.925 37.5,21.425 37.5,22.5 38.6,23.6 41.2,23.6 ; U3.B3 39.4,25.4 41.2,23.6 ; R2.1 44.573,22.773 43.746,23.6 41.2,23.6
NetJ1_7: J1.7 R3.1 U2.10
NetJ1_9: J1.9 R4.1 U2.9
NetJ1_11: J1.11 R5.1 U3.A2 | length 13
  Top Layer w0.14: U3.A2 38.45,26.05 40.15,26.05 41.7,24.5 44.15,24.5 44.95,23.7 50.1,23.7
NetJ1_13: J1.13 U4.7 | length 3.8
  Top Layer w0.14: U4.7 48.67,27.825 49.26,27.235 49.26,27.018 49.342,26.936 51.264,26.936 51.6,26.6
pads on no net: J1.2 J1.4 J1.5 J1.6 J1.8 J1.10 J1.12 J1.14 U1.3 U1.4 U1.7 U4.2 U4.3 U4.4 U4.6 U4.9

## Polygon pours and split planes (outlines as drawn)
no net on Layer0 "Default Coverlay 1 Bottom" (split plane): 0,47.797 0.039,47.89 0.11,47.961 0.203,48 99.797,48 99.89,47.961 99.961,47.89 100,47.797 100,0.203 99.961,0.11 99.89,0.039 99.797,0 0.203,0 0.11,0.039 0.039,0.11 0,0.203
no net on Layer0 "Default Coverlay 1 Top" (split plane): 0,47.797 0.039,47.89 0.11,47.961 0.203,48 99.797,48 99.89,47.961 99.961,47.89 100,47.797 100,0.203 99.961,0.11 99.89,0.039 99.797,0 0.203,0 0.11,0.039 0.039,0.11 0,0.203

## Silkscreen, mask and mechanical layers (free items; w line width, h text height)
Mechanical 1:
  lines w0.254: 56.5,21.6 ccw(c56.5,17.6) 52.5,17.6 52.5,2 cw(c50.5,2) 50.5,0 2,0 cw(c2,2) 0,2 0,46 cw(c2,46) 2,48 50.5,48 cw(c50.5,46) 52.5,46 52.5,30.4 ccw(c56.5,30.4) 56.5,26.4 100,26.4 100,21.6 ; 56.5,21.6 56.5,21.6 ; 56.5,21.6 100,21.6 ; 100,21.6 100,21.6 ; 100,21.6 100,21.6